# Altium PCB CET-124-120W.PcbDoc
Units mm, origin at the board's own origin, x right, y up, seen from the top; angles counter-clockwise.
Board outline 309.7 x 148.55 mm, 2 copper layers (Top Layer, Bottom Layer); 120 components, 59 nets, 857 pads, 0 vias.
Unrouted connection lines stored in the file: 4.
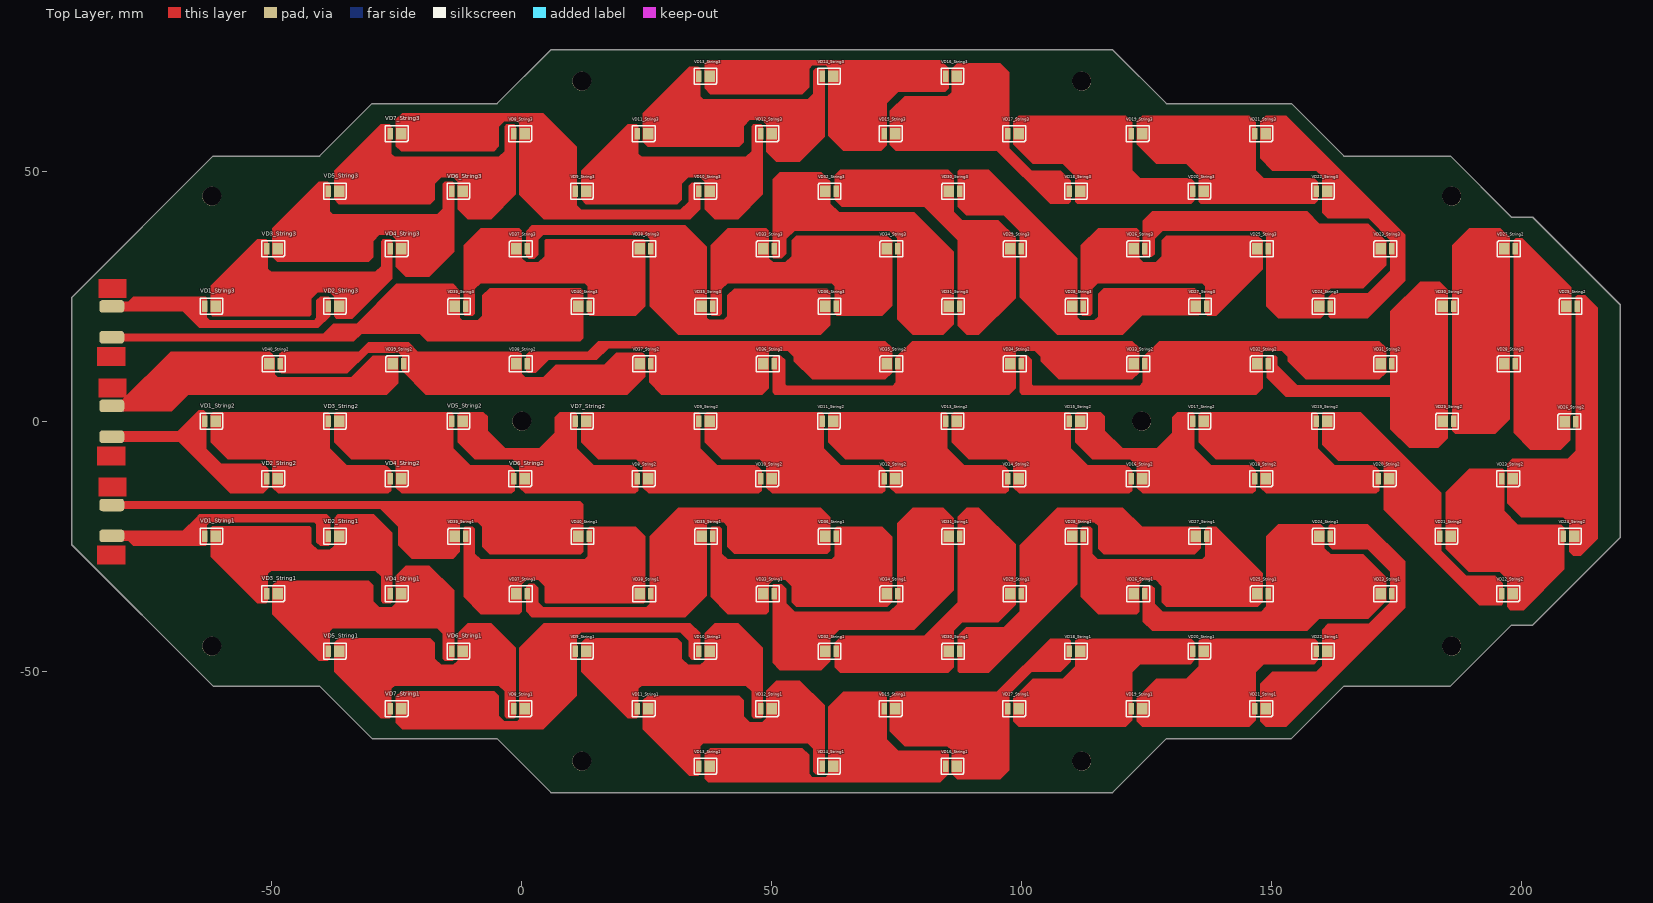
[diagram p0: Top Layer view]
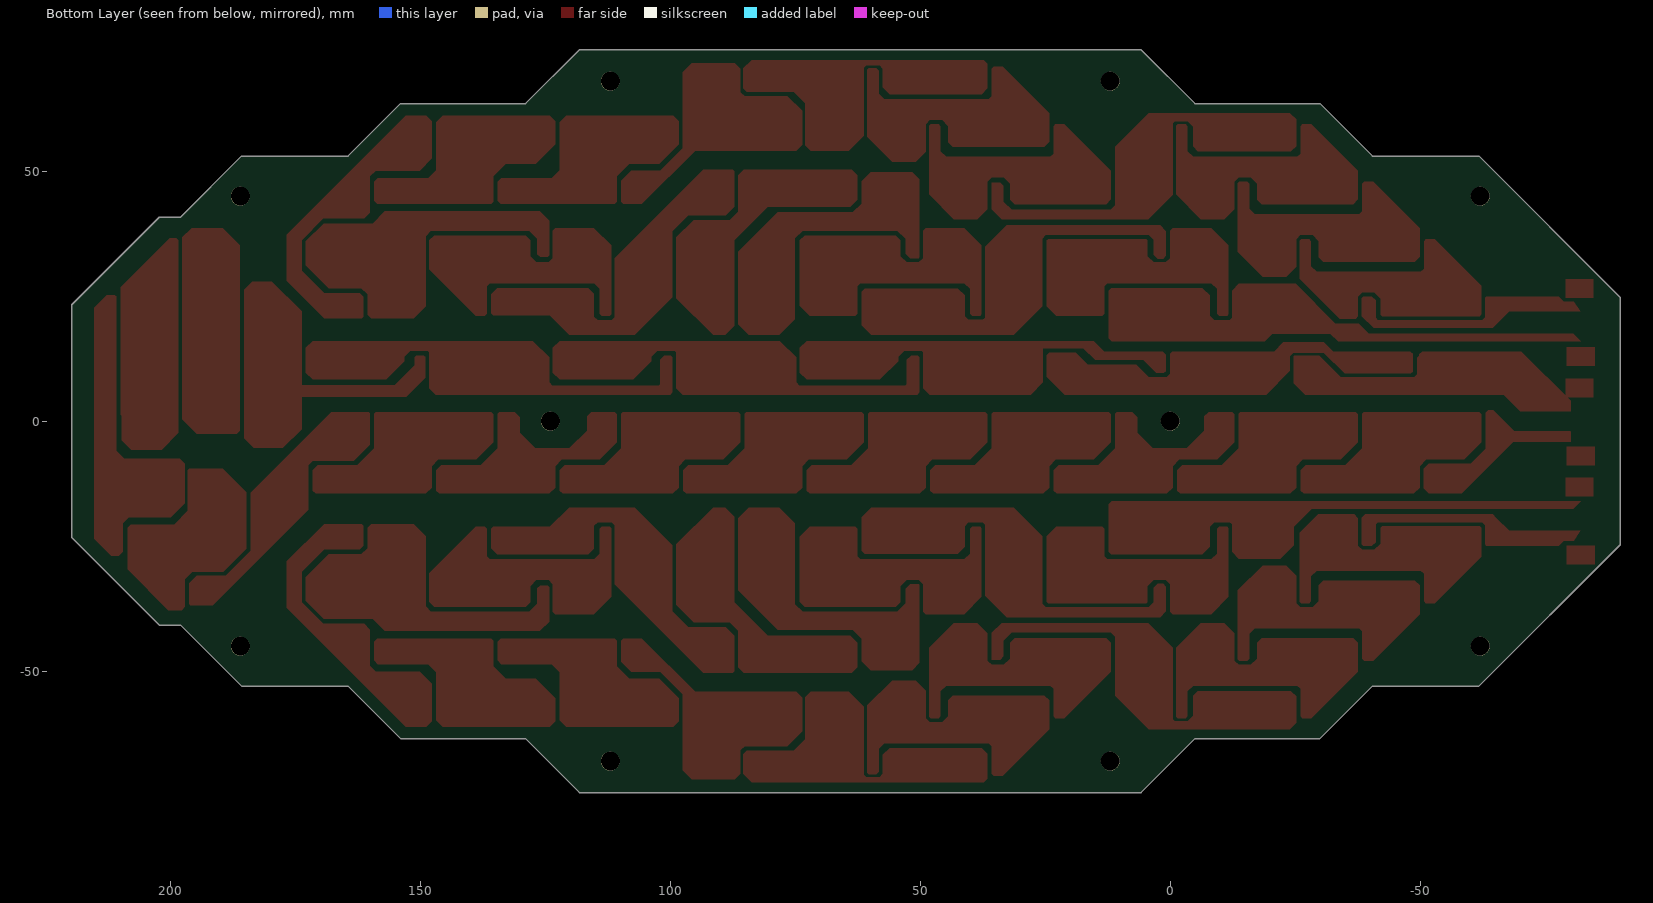
[diagram p1: Bottom Layer view, seen from below]

## Layer stack, top to bottom
Top Solder: solder mask 0.0102, Solder Resist, Dk 3.5
Top Layer: signal copper 0.0356
Dielectric 1: dielectric 0.32, FR-4, Dk 4.8
Bottom Layer: signal copper 0.0356
Bottom Solder: solder mask 0.0102, Solder Resist, Dk 3.5

## Board outline
-61.725,-53 -40.45,-53 -29.95,-63.5 -4.95,-63.5 5.825,-74.275 118.175,-74.275 128.95,-63.5 153.95,-63.5 164.45,-53 185.725,-53 197.95,-40.775 202.2,-40.775 219.7,-23.275 219.7,23.275 202.2,40.775 197.95,40.775 185.725,53 164.45,53 153.95,63.5 128.95,63.5 118.175,74.275 5.825,74.275 -4.95,63.5 -29.95,63.5 -40.45,53 -61.725,53 -90,24.725 -90,-24.725

## Design rules (kind name [scope] priority, off if disabled: settings)
Clearance [InNet('LED+') vs InNet('GND')] p1: gap=0.8
Clearance Clearance_1 [InNetClass('string')] p2: gap=0.55
Clearance Clearance_2 [All] p3: gap=0.254
ComponentClearance [All] p1: gap=0 collisioncheckmode=3 verticalgap=0 showdistances=FALSE
PolygonConnect [All] p1: connectstyle=Relief reliefconductorwidth=0.254 reliefentries=4 polygonreliefangle="90 Angle" airgapwidth=0.254
RoutingVias [All] p1: holewidth=0.711 width=1.27 viastyle="Through Hole" minholewidth=0.711 minwidth=1.27 maxholewidth=0.711 maxwidth=1.27
SolderMaskExpansion [All] p1: expansion=0.102
Width [All] p1: maxlimit=5 minlimit=0.1 preferedwidth=0.254
29 further rules are at their usual default settings.

## Classes and differential pairs
component class String1: VD1_String1 VD2_String1 VD3_String1 VD4_String1 VD5_String1 VD6_String1 VD7_String1 VD8_String1 VD9_String1 VD10_String1 VD11_String1 VD12_String1 VD13_String1 VD14_String1 VD15_String1 VD16_String1 VD17_String1 VD18_String1 VD19_String1 VD20_String1 VD21_String1 VD22_String1 VD23_String1 VD24_String1 VD25_String1 VD26_String1 VD27_String1 VD28_String1 VD29_String1 VD30_String1 VD31_String1 VD32_String1 VD33_String1 VD34_String1 VD35_String1 VD36_String1 VD37_String1 VD38_String1 VD39_String1 VD40_String1
component class String2: VD1_String2 VD2_String2 VD3_String2 VD4_String2 VD5_String2 VD6_String2 VD7_String2 VD8_String2 VD9_String2 VD10_String2 VD11_String2 VD12_String2 VD13_String2 VD14_String2 VD15_String2 VD16_String2 VD17_String2 VD18_String2 VD19_String2 VD20_String2 VD21_String2 VD22_String2 VD23_String2 VD24_String2 VD25_String2 VD26_String2 VD27_String2 VD28_String2 VD29_String2 VD30_String2 VD31_String2 VD32_String2 VD33_String2 VD34_String2 VD35_String2 VD36_String2 VD37_String2 VD38_String2 VD39_String2 VD40_String2
component class String3: VD1_String3 VD2_String3 VD3_String3 VD4_String3 VD5_String3 VD6_String3 VD7_String3 VD8_String3 VD9_String3 VD10_String3 VD11_String3 VD12_String3 VD13_String3 VD14_String3 VD15_String3 VD16_String3 VD17_String3 VD18_String3 VD19_String3 VD20_String3 VD21_String3 VD22_String3 VD23_String3 VD24_String3 VD25_String3 VD26_String3 VD27_String3 VD28_String3 VD29_String3 VD30_String3 VD31_String3 VD32_String3 VD33_String3 VD34_String3 VD35_String3 VD36_String3 VD37_String3 VD38_String3 VD39_String3 VD40_String3
channel class CET-124-120W: String1 String2 String3

## Components (designator, comment, footprint, x,y, rotation, side; value= is the part's Value field where it differs from the comment)
VD1_String1 "LED2835_6V_1W" 2835 -62,-23 r180 top (schematic designator VD1)
VD1_String2 "LED2835_6V_1W" 2835 -62,0 r180 top (schematic designator VD1)
VD1_String3 "LED2835_6V_1W" 2835 -62,23 r180 top (schematic designator VD1)
VD2_String1 "LED2835_6V_1W" 2835 -37.3,-23 r180 top (schematic designator VD2)
VD2_String2 "LED2835_6V_1W" 2835 -49.65,-11.5 r180 top (schematic designator VD2)
VD2_String3 "LED2835_6V_1W" 2835 -37.3,23 r180 top (schematic designator VD2)
VD3_String1 "LED2835_6V_1W" 2835 -49.65,-34.5 r180 top (schematic designator VD3)
VD3_String2 "LED2835_6V_1W" 2835 -37.3,0 r180 top (schematic designator VD3)
VD3_String3 "LED2835_6V_1W" 2835 -49.65,34.5 r180 top (schematic designator VD3)
VD4_String1 "LED2835_6V_1W" 2835 -24.95,-34.5 r180 top (schematic designator VD4)
VD4_String2 "LED2835_6V_1W" 2835 -24.95,-11.5 r180 top (schematic designator VD4)
VD4_String3 "LED2835_6V_1W" 2835 -24.95,34.5 r180 top (schematic designator VD4)
VD5_String1 "LED2835_6V_1W" 2835 -37.3,-46 r180 top (schematic designator VD5)
VD5_String2 "LED2835_6V_1W" 2835 -12.6,0 r180 top (schematic designator VD5)
VD5_String3 "LED2835_6V_1W" 2835 -37.3,46 r180 top (schematic designator VD5)
VD6_String1 "LED2835_6V_1W" 2835 -12.6,-46 r180 top (schematic designator VD6)
VD6_String2 "LED2835_6V_1W" 2835 -0.25,-11.5 r180 top (schematic designator VD6)
VD6_String3 "LED2835_6V_1W" 2835 -12.6,46 r180 top (schematic designator VD6)
VD7_String1 "LED2835_6V_1W" 2835 -24.95,-57.5 r180 top (schematic designator VD7)
VD7_String2 "LED2835_6V_1W" 2835 12.1,0 r180 top (schematic designator VD7)
VD7_String3 "LED2835_6V_1W" 2835 -24.95,57.5 r180 top (schematic designator VD7)
VD8_String1 "LED2835_6V_1W" 2835 -0.25,-57.5 r180 top (schematic designator VD8)
VD8_String2 "LED2835_6V_1W" 2835 24.45,-11.5 r180 top (schematic designator VD8)
VD8_String3 "LED2835_6V_1W" 2835 -0.25,57.5 r180 top (schematic designator VD8)
VD9_String1 "LED2835_6V_1W" 2835 12.1,-46 r180 top (schematic designator VD9)
VD9_String2 "LED2835_6V_1W" 2835 36.8,0 r180 top (schematic designator VD9)
VD9_String3 "LED2835_6V_1W" 2835 12.1,46 r180 top (schematic designator VD9)
VD10_String1 "LED2835_6V_1W" 2835 36.8,-46 r180 top (schematic designator VD10)
VD10_String2 "LED2835_6V_1W" 2835 49.15,-11.5 r180 top (schematic designator VD10)
VD10_String3 "LED2835_6V_1W" 2835 36.8,46 r180 top (schematic designator VD10)
VD11_String1 "LED2835_6V_1W" 2835 24.45,-57.5 r180 top (schematic designator VD11)
VD11_String2 "LED2835_6V_1W" 2835 61.5,0 r180 top (schematic designator VD11)
VD11_String3 "LED2835_6V_1W" 2835 24.45,57.5 r180 top (schematic designator VD11)
VD12_String1 "LED2835_6V_1W" 2835 49.15,-57.5 r180 top (schematic designator VD12)
VD12_String2 "LED2835_6V_1W" 2835 73.85,-11.5 r180 top (schematic designator VD12)
VD12_String3 "LED2835_6V_1W" 2835 49.15,57.5 r180 top (schematic designator VD12)
VD13_String1 "LED2835_6V_1W" 2835 36.8,-69 r180 top (schematic designator VD13)
VD13_String2 "LED2835_6V_1W" 2835 86.2,0 r180 top (schematic designator VD13)
VD13_String3 "LED2835_6V_1W" 2835 36.8,69 r180 top (schematic designator VD13)
VD14_String1 "LED2835_6V_1W" 2835 61.5,-69 r180 top (schematic designator VD14)
VD14_String2 "LED2835_6V_1W" 2835 98.55,-11.5 r180 top (schematic designator VD14)
VD14_String3 "LED2835_6V_1W" 2835 61.5,69 r180 top (schematic designator VD14)
VD15_String1 "LED2835_6V_1W" 2835 73.85,-57.5 r180 top (schematic designator VD15)
VD15_String2 "LED2835_6V_1W" 2835 110.9,0 r180 top (schematic designator VD15)
VD15_String3 "LED2835_6V_1W" 2835 73.85,57.5 r180 top (schematic designator VD15)
VD16_String1 "LED2835_6V_1W" 2835 86.2,-69 r180 top (schematic designator VD16)
VD16_String2 "LED2835_6V_1W" 2835 123.25,-11.5 r180 top (schematic designator VD16)
VD16_String3 "LED2835_6V_1W" 2835 86.2,69 r180 top (schematic designator VD16)
VD17_String1 "LED2835_6V_1W" 2835 98.55,-57.5 r180 top (schematic designator VD17)
VD17_String2 "LED2835_6V_1W" 2835 135.6,0 r180 top (schematic designator VD17)
VD17_String3 "LED2835_6V_1W" 2835 98.55,57.5 r180 top (schematic designator VD17)
VD18_String1 "LED2835_6V_1W" 2835 110.9,-46 r180 top (schematic designator VD18)
VD18_String2 "LED2835_6V_1W" 2835 147.95,-11.5 r180 top (schematic designator VD18)
VD18_String3 "LED2835_6V_1W" 2835 110.9,46 r180 top (schematic designator VD18)
VD19_String1 "LED2835_6V_1W" 2835 123.25,-57.5 r180 top (schematic designator VD19)
VD19_String2 "LED2835_6V_1W" 2835 160.3,0 r180 top (schematic designator VD19)
VD19_String3 "LED2835_6V_1W" 2835 123.25,57.5 r180 top (schematic designator VD19)
VD20_String1 "LED2835_6V_1W" 2835 135.6,-46 r180 top (schematic designator VD20)
VD20_String2 "LED2835_6V_1W" 2835 172.65,-11.5 r180 top (schematic designator VD20)
VD20_String3 "LED2835_6V_1W" 2835 135.6,46 r180 top (schematic designator VD20)
VD21_String1 "LED2835_6V_1W" 2835 147.95,-57.5 r180 top (schematic designator VD21)
VD21_String2 "LED2835_6V_1W" 2835 185,-23 r180 top (schematic designator VD21)
VD21_String3 "LED2835_6V_1W" 2835 147.95,57.5 r180 top (schematic designator VD21)
VD22_String1 "LED2835_6V_1W" 2835 160.3,-46 r180 top (schematic designator VD22)
VD22_String2 "LED2835_6V_1W" 2835 197.35,-34.5 r180 top (schematic designator VD22)
VD22_String3 "LED2835_6V_1W" 2835 160.3,46 r180 top (schematic designator VD22)
VD23_String1 "LED2835_6V_1W" 2835 172.65,-34.5 r0 top (schematic designator VD23)
VD23_String2 "LED2835_6V_1W" 2835 197.35,-11.5 r180 top (schematic designator VD23)
VD23_String3 "LED2835_6V_1W" 2835 172.65,34.5 r0 top (schematic designator VD23)
VD24_String1 "LED2835_6V_1W" 2835 160.3,-23 r0 top (schematic designator VD24)
VD24_String2 "LED2835_6V_1W" 2835 209.7,-23 r180 top (schematic designator VD24)
VD24_String3 "LED2835_6V_1W" 2835 160.3,23 r0 top (schematic designator VD24)
VD25_String1 "LED2835_6V_1W" 2835 147.95,-34.5 r0 top (schematic designator VD25)
VD25_String2 "LED2835_6V_1W" 2835 209.7,23 r0 top (schematic designator VD25)
VD25_String3 "LED2835_6V_1W" 2835 147.95,34.5 r0 top (schematic designator VD25)
VD26_String1 "LED2835_6V_1W" 2835 123.25,-34.5 r0 top (schematic designator VD26)
VD26_String2 "LED2835_6V_1W" 2835 209.45,-0.075 r0 top (schematic designator VD26)
VD26_String3 "LED2835_6V_1W" 2835 123.25,34.5 r0 top (schematic designator VD26)
VD27_String1 "LED2835_6V_1W" 2835 135.6,-23 r0 top (schematic designator VD27)
VD27_String2 "LED2835_6V_1W" 2835 197.35,34.5 r0 top (schematic designator VD27)
VD27_String3 "LED2835_6V_1W" 2835 135.6,23 r0 top (schematic designator VD27)
VD28_String1 "LED2835_6V_1W" 2835 110.9,-23 r0 top (schematic designator VD28)
VD28_String2 "LED2835_6V_1W" 2835 197.35,11.5 r0 top (schematic designator VD28)
VD28_String3 "LED2835_6V_1W" 2835 110.9,23 r0 top (schematic designator VD28)
VD29_String1 "LED2835_6V_1W" 2835 98.55,-34.5 r0 top (schematic designator VD29)
VD29_String2 "LED2835_6V_1W" 2835 185,0 r0 top (schematic designator VD29)
VD29_String3 "LED2835_6V_1W" 2835 98.55,34.5 r0 top (schematic designator VD29)
VD30_String1 "LED2835_6V_1W" 2835 86.2,-46 r0 top (schematic designator VD30)
VD30_String2 "LED2835_6V_1W" 2835 185,23 r0 top (schematic designator VD30)
VD30_String3 "LED2835_6V_1W" 2835 86.2,46 r0 top (schematic designator VD30)
VD31_String1 "LED2835_6V_1W" 2835 86.2,-23 r0 top (schematic designator VD31)
VD31_String2 "LED2835_6V_1W" 2835 172.65,11.5 r0 top (schematic designator VD31)
VD31_String3 "LED2835_6V_1W" 2835 86.2,23 r0 top (schematic designator VD31)
VD32_String1 "LED2835_6V_1W" 2835 61.5,-46 r0 top (schematic designator VD32)
VD32_String2 "LED2835_6V_1W" 2835 147.95,11.5 r0 top (schematic designator VD32)
VD32_String3 "LED2835_6V_1W" 2835 61.5,46 r0 top (schematic designator VD32)
VD33_String1 "LED2835_6V_1W" 2835 49.15,-34.5 r0 top (schematic designator VD33)
VD33_String2 "LED2835_6V_1W" 2835 123.25,11.5 r0 top (schematic designator VD33)
VD33_String3 "LED2835_6V_1W" 2835 49.15,34.5 r0 top (schematic designator VD33)
VD34_String1 "LED2835_6V_1W" 2835 73.85,-34.5 r0 top (schematic designator VD34)
VD34_String2 "LED2835_6V_1W" 2835 98.55,11.5 r0 top (schematic designator VD34)
VD34_String3 "LED2835_6V_1W" 2835 73.85,34.5 r0 top (schematic designator VD34)
VD35_String1 "LED2835_6V_1W" 2835 36.8,-23 r0 top (schematic designator VD35)
VD35_String2 "LED2835_6V_1W" 2835 73.85,11.5 r0 top (schematic designator VD35)
VD35_String3 "LED2835_6V_1W" 2835 36.8,23 r0 top (schematic designator VD35)
VD36_String1 "LED2835_6V_1W" 2835 61.5,-23 r0 top (schematic designator VD36)
VD36_String2 "LED2835_6V_1W" 2835 49.15,11.5 r0 top (schematic designator VD36)
VD36_String3 "LED2835_6V_1W" 2835 61.5,23 r0 top (schematic designator VD36)
VD37_String1 "LED2835_6V_1W" 2835 -0.25,-34.5 r0 top (schematic designator VD37)
VD37_String2 "LED2835_6V_1W" 2835 24.45,11.5 r0 top (schematic designator VD37)
VD37_String3 "LED2835_6V_1W" 2835 -0.25,34.5 r0 top (schematic designator VD37)
VD38_String1 "LED2835_6V_1W" 2835 24.45,-34.5 r0 top (schematic designator VD38)
VD38_String2 "LED2835_6V_1W" 2835 -0.25,11.5 r0 top (schematic designator VD38)
VD38_String3 "LED2835_6V_1W" 2835 24.45,34.5 r0 top (schematic designator VD38)
VD39_String1 "LED2835_6V_1W" 2835 -12.6,-23 r0 top (schematic designator VD39)
VD39_String2 "LED2835_6V_1W" 2835 -24.95,11.5 r0 top (schematic designator VD39)
VD39_String3 "LED2835_6V_1W" 2835 -12.6,23 r0 top (schematic designator VD39)
VD40_String1 "LED2835_6V_1W" 2835 12.1,-23 r0 top (schematic designator VD40)
VD40_String2 "LED2835_6V_1W" 2835 -49.65,11.5 r0 top (schematic designator VD40)
VD40_String3 "LED2835_6V_1W" 2835 12.1,23 r0 top (schematic designator VD40)

## Footprints (in the part's own frame and the unit in brackets; to place one, negate y for a bottom-side part, rotate by r counter-clockwise, add the part's x,y. Pads: shape width x height; smd on the part's side, far side on the other; paste and mask are expansions set on the pad)
2835 [mm] "1"
  round 0.1 on Mech15: 0(0.225,1.15) 0(0.225,-1.15) 0(0.825,1.15) 0(0.825,-1.15)
  rect 1.1x2.3 smd paste-0.5 mask+0.1: 1(1.375,0)
  rect 2.1x2.3 smd mask+0.1: 2(-0.825,0)
  silkscreen extent -2.24,-1.58 2.33,1.57, body extent -1.77,-1.4 1.74,1.4, height 0.82

## Part data
VD1_String1 VD1_String2 VD1_String3 VD2_String1 VD2_String2 VD2_String3 VD3_String1 VD3_String2 VD3_String3 VD4_String1 VD4_String2 VD4_String3 VD5_String1 VD5_String2 VD5_String3 VD6_String1 VD6_String2 VD6_String3 VD7_String1 VD7_String2 VD7_String3 VD8_String1 VD8_String2 VD8_String3 VD9_String1 VD9_String2 VD9_String3 VD10_String1 VD10_String2 VD10_String3 VD11_String1 VD11_String2 VD11_String3 VD12_String1 VD12_String2 VD12_String3 VD13_String1 VD13_String2 VD13_String3 VD14_String1 VD14_String2 VD14_String3 VD15_String1 VD15_String2 VD15_String3 VD16_String1 VD16_String2 VD16_String3 VD17_String1 VD17_String2 VD17_String3 VD18_String1 VD18_String2 VD18_String3 VD19_String1 VD19_String2 VD19_String3 VD20_String1 VD20_String2 VD20_String3 VD21_String1 VD21_String2 VD21_String3 VD22_String1 VD22_String2 VD22_String3 VD23_String1 VD23_String2 VD23_String3 VD24_String1 VD24_String2 VD24_String3 VD25_String1 VD25_String2 VD25_String3 VD26_String1 VD26_String2 VD26_String3 VD27_String1 VD27_String2 VD27_String3 VD28_String1 VD28_String2 VD28_String3 VD29_String1 VD29_String2 VD29_String3 VD30_String1 VD30_String2 VD30_String3 VD31_String1 VD31_String2 VD31_String3 VD32_String1 VD32_String2 VD32_String3 VD33_String1 VD33_String2 VD33_String3 VD34_String1 VD34_String2 VD34_String3 VD35_String1 VD35_String2 VD35_String3 VD36_String1 VD36_String2 VD36_String3 VD37_String1 VD37_String2 VD37_String3 VD38_String1 VD38_String2 VD38_String3 VD39_String1 VD39_String2 VD39_String3 VD40_String1 VD40_String2 VD40_String3: library part Светодиод

## Free pads (board coordinates)
  rrect50% 5x2.5 smd: 3(-82,-22.95) 3(-82,-16.775) 3(-82,-3.125) 3(-82,3.05) 3(-82,16.775) 3(-82,22.95)
  round 3.8 hole 3.8: 4(-62,-45) 4(-62,45) 4(0,0) 4(12,-68) 4(12,68) 4(112,-68) 4(112,68) 4(124,0) 4(186,-45) 4(186,45)
  round 1.524 on Mech1: 49(-62,-23) 49(-62,0) 49(-62,23) 50(-49.65,-34.5) 50(-49.65,-11.5) 50(-49.65,11.5) 50(-49.65,34.5) 50(-37.3,-23) 50(-37.3,0) 50(-37.3,23) 50(-37.3,-46) 50(-37.3,46) 51(-24.95,-34.5) 51(-24.95,-11.5) 51(-24.95,11.5) 51(-24.95,34.5) 51(-24.95,-57.5) 51(-24.95,57.5) 51(-12.6,-23) 51(-12.6,0) 51(-12.6,23) 51(-12.6,-46) 51(-12.6,46) 52(-0.25,-34.5) 52(-0.25,-11.5) 52(-0.25,11.5) 52(-0.25,34.5) 52(-0.25,-57.5) 52(-0.25,57.5) 52(12.1,-23) 52(12.1,0) 52(12.1,23) 52(12.1,-46) 52(12.1,46) 53(24.45,-34.5) 53(24.45,-11.5) 53(24.45,11.5) 53(24.45,34.5) 53(24.45,-57.5) 53(24.45,57.5) 53(36.8,-23) 53(36.8,0) 53(36.8,23) 53(36.8,-69) 53(36.8,-46) 53(36.8,46) 53(36.8,69) 54(49.15,-34.5) 54(49.15,-11.5) 54(49.15,11.5) 54(49.15,34.5) 54(49.15,-57.5) 54(49.15,57.5) 54(61.5,-23) 54(61.5,0) 54(61.5,23) 54(61.5,-86) 54(61.5,-69) 54(61.5,-46) 54(61.5,46) 54(61.5,69) 55(73.85,-34.5) 55(73.85,-11.5) 55(73.85,11.5) 55(73.85,34.5) 55(73.85,-57.5) 55(73.85,57.5) 55(86.2,-23) 55(86.2,0) 55(86.2,23) 55(86.2,-69) 55(86.2,-46) 55(86.2,46) 55(86.2,69) 56(98.55,-34.5) 56(98.55,-11.5) 56(98.55,11.5) 56(98.55,34.5) 56(98.55,-57.5) 56(98.55,57.5) 56(110.9,-23) 56(110.9,0) 56(110.9,23) 56(110.9,-46) 56(110.9,46) 57(123.25,-34.5) 57(123.25,-11.5) 57(123.25,11.5) 57(123.25,34.5) 57(123.25,-57.5) 57(123.25,57.5) 57(135.6,-23) 57(135.6,0) 57(135.6,23) 57(135.6,-46) 57(135.6,46) 58(147.95,-34.5) 58(147.95,-11.5) 58(147.95,11.5) 58(147.95,34.5) 58(147.95,-57.5) 58(147.95,57.5) 58(160.3,-23) 58(160.3,0) 58(160.3,23) 58(160.3,-46) 58(160.3,46) 59(172.65,-34.5) 59(172.65,-11.5) 59(172.65,11.5) 59(172.65,34.5) 59(185,-23) 59(185,0) 59(185,23) 59(197.35,-34.5) 59(197.35,-11.5) 59(197.35,11.5) 59(197.35,34.5) 60(209.7,-23) 60(209.7,0) 60(209.7,23)

## Nets (pads, with @x,y where several pads share a name; then routed paths per layer and width w, separated by ;. In a path a pad name is that pad's centre, name@x,y a point inside that pad or via, vN(x,y) a via of type N, cw(c..) or ccw(c..) an arc to the next point about the centre after c; other vN are vias at no path point)
GND: pad.3@-82,3.05 pad.3@-82,16.775 pad.3@-82,-16.775 VD39_String1.2 VD39_String2.2 VD39_String3.2 VD40_String1.2 VD40_String2.2 VD40_String3.2
LED+: pad.3@-82,22.95 pad.3@-82,-3.125 pad.3@-82,-22.95 VD1_String1.1 VD1_String2.1 VD1_String3.1 VD2_String1.1 VD2_String2.1 VD2_String3.1
NetVD1_String1_2: VD1_String1.2 VD2_String1.2 VD3_String1.1 VD4_String1.1
NetVD1_String2_2: VD1_String2.2 VD2_String2.2 VD3_String2.1 VD4_String2.1
NetVD1_String3_2: VD1_String3.2 VD2_String3.2 VD3_String3.1 VD4_String3.1
NetVD3_String1_2: VD3_String1.2 VD4_String1.2 VD5_String1.1 VD6_String1.1
NetVD3_String2_2: VD3_String2.2 VD4_String2.2 VD5_String2.1 VD6_String2.1
NetVD3_String3_2: VD3_String3.2 VD4_String3.2 VD5_String3.1 VD6_String3.1
NetVD5_String1_2: VD5_String1.2 VD6_String1.2 VD7_String1.1 VD8_String1.1
NetVD5_String2_2: VD5_String2.2 VD6_String2.2 VD7_String2.1 VD8_String2.1
NetVD5_String3_2: VD5_String3.2 VD6_String3.2 VD7_String3.1 VD8_String3.1
NetVD7_String1_2: VD7_String1.2 VD8_String1.2 VD9_String1.1 VD10_String1.1
NetVD7_String2_2: VD7_String2.2 VD8_String2.2 VD9_String2.1 VD10_String2.1
NetVD7_String3_2: VD7_String3.2 VD8_String3.2 VD9_String3.1 VD10_String3.1
NetVD9_String1_2: VD9_String1.2 VD10_String1.2 VD11_String1.1 VD12_String1.1
NetVD9_String2_2: VD9_String2.2 VD10_String2.2 VD11_String2.1 VD12_String2.1
NetVD9_String3_2: VD9_String3.2 VD10_String3.2 VD11_String3.1 VD12_String3.1
NetVD11_String1_2: VD11_String1.2 VD12_String1.2 VD13_String1.1 VD14_String1.1
NetVD11_String2_2: VD11_String2.2 VD12_String2.2 VD13_String2.1 VD14_String2.1
NetVD11_String3_2: VD11_String3.2 VD12_String3.2 VD13_String3.1 VD14_String3.1
NetVD13_String1_2: VD13_String1.2 VD14_String1.2 VD15_String1.1 VD16_String1.1
NetVD13_String2_2: VD13_String2.2 VD14_String2.2 VD15_String2.1 VD16_String2.1
NetVD13_String3_2: VD13_String3.2 VD14_String3.2 VD15_String3.1 VD16_String3.1
NetVD15_String1_2: VD15_String1.2 VD16_String1.2 VD17_String1.1 VD18_String1.1
NetVD15_String2_2: VD15_String2.2 VD16_String2.2 VD17_String2.1 VD18_String2.1
NetVD15_String3_2: VD15_String3.2 VD16_String3.2 VD17_String3.1 VD18_String3.1
NetVD17_String1_2: VD17_String1.2 VD18_String1.2 VD19_String1.1 VD20_String1.1
NetVD17_String2_2: VD17_String2.2 VD18_String2.2 VD19_String2.1 VD20_String2.1
NetVD17_String3_2: VD17_String3.2 VD18_String3.2 VD19_String3.1 VD20_String3.1
NetVD19_String1_2: VD19_String1.2 VD20_String1.2 VD21_String1.1 VD22_String1.1
NetVD19_String2_2: VD19_String2.2 VD20_String2.2 VD21_String2.1 VD22_String2.1
NetVD19_String3_2: VD19_String3.2 VD20_String3.2 VD21_String3.1 VD22_String3.1
NetVD21_String1_2: VD21_String1.2 VD22_String1.2 VD23_String1.1 VD24_String1.1
NetVD21_String2_2: VD21_String2.2 VD22_String2.2 VD23_String2.1 VD24_String2.1
NetVD21_String3_2: VD21_String3.2 VD22_String3.2 VD23_String3.1 VD24_String3.1
NetVD23_String1_2: VD23_String1.2 VD24_String1.2 VD25_String1.1 VD26_String1.1
NetVD23_String2_2: VD23_String2.2 VD24_String2.2 VD25_String2.1 VD26_String2.1
NetVD23_String3_2: VD23_String3.2 VD24_String3.2 VD25_String3.1 VD26_String3.1
NetVD25_String1_2: VD25_String1.2 VD26_String1.2 VD27_String1.1 VD28_String1.1
NetVD25_String2_2: VD25_String2.2 VD26_String2.2 VD27_String2.1 VD28_String2.1
NetVD25_String3_2: VD25_String3.2 VD26_String3.2 VD27_String3.1 VD28_String3.1
NetVD27_String1_2: VD27_String1.2 VD28_String1.2 VD29_String1.1 VD30_String1.1
NetVD27_String2_2: VD27_String2.2 VD28_String2.2 VD29_String2.1 VD30_String2.1
NetVD27_String3_2: VD27_String3.2 VD28_String3.2 VD29_String3.1 VD30_String3.1
NetVD29_String1_2: VD29_String1.2 VD30_String1.2 VD31_String1.1 VD32_String1.1
NetVD29_String2_2: VD29_String2.2 VD30_String2.2 VD31_String2.1 VD32_String2.1
NetVD29_String3_2: VD29_String3.2 VD30_String3.2 VD31_String3.1 VD32_String3.1
NetVD31_String1_2: VD31_String1.2 VD32_String1.2 VD33_String1.1 VD34_String1.1
NetVD31_String2_2: VD31_String2.2 VD32_String2.2 VD33_String2.1 VD34_String2.1
NetVD31_String3_2: VD31_String3.2 VD32_String3.2 VD33_String3.1 VD34_String3.1
NetVD33_String1_2: VD33_String1.2 VD34_String1.2 VD35_String1.1 VD36_String1.1
NetVD33_String2_2: VD33_String2.2 VD34_String2.2 VD35_String2.1 VD36_String2.1
NetVD33_String3_2: VD33_String3.2 VD34_String3.2 VD35_String3.1 VD36_String3.1
NetVD35_String1_2: VD35_String1.2 VD36_String1.2 VD37_String1.1 VD38_String1.1
NetVD35_String2_2: VD35_String2.2 VD36_String2.2 VD37_String2.1 VD38_String2.1
NetVD35_String3_2: VD35_String3.2 VD36_String3.2 VD37_String3.1 VD38_String3.1
NetVD37_String1_2: VD37_String1.2 VD38_String1.2 VD39_String1.1 VD40_String1.1
NetVD37_String2_2: VD37_String2.2 VD38_String2.2 VD39_String2.1 VD40_String2.1
NetVD37_String3_2: VD37_String3.2 VD38_String3.2 VD39_String3.1 VD40_String3.1
pads on no net: VD1_String1.0 VD1_String2.0 VD1_String3.0 VD2_String1.0 VD2_String2.0 VD2_String3.0 VD3_String1.0 VD3_String2.0 VD3_String3.0 VD4_String1.0 VD4_String2.0 VD4_String3.0 VD5_String1.0 VD5_String2.0 VD5_String3.0 VD6_String1.0 VD6_String2.0 VD6_String3.0 VD7_String1.0 VD7_String2.0 VD7_String3.0 VD8_String1.0 VD8_String2.0 VD8_String3.0 VD9_String1.0 VD9_String2.0 VD9_String3.0 VD10_String1.0 VD10_String2.0 VD10_String3.0 VD11_String1.0 VD11_String2.0 VD11_String3.0 VD12_String1.0 VD12_String2.0 VD12_String3.0 VD13_String1.0 VD13_String2.0 VD13_String3.0 VD14_String1.0 VD14_String2.0 VD14_String3.0 VD15_String1.0 VD15_String2.0 VD15_String3.0 VD16_String1.0 VD16_String2.0 VD16_String3.0 VD17_String1.0 VD17_String2.0 VD17_String3.0 VD18_String1.0 VD18_String2.0 VD18_String3.0 VD19_String1.0 VD19_String2.0 VD19_String3.0 VD20_String1.0 VD20_String2.0 VD20_String3.0 VD21_String1.0 VD21_String2.0 VD21_String3.0 VD22_String1.0 VD22_String2.0 VD22_String3.0 VD23_String1.0 VD23_String2.0 VD23_String3.0 VD24_String1.0 VD24_String2.0 VD24_String3.0 VD25_String1.0 VD25_String2.0 VD25_String3.0 VD26_String1.0 VD26_String2.0 VD26_String3.0 VD27_String1.0 VD27_String2.0 VD27_String3.0 VD28_String1.0 VD28_String2.0 VD28_String3.0 VD29_String1.0 VD29_String2.0 VD29_String3.0 VD30_String1.0 VD30_String2.0 VD30_String3.0 VD31_String1.0 VD31_String2.0 VD31_String3.0 VD32_String1.0 VD32_String2.0 VD32_String3.0 VD33_String1.0 VD33_String2.0 VD33_String3.0 VD34_String1.0 VD34_String2.0 VD34_String3.0 VD35_String1.0 VD35_String2.0 VD35_String3.0 VD36_String1.0 VD36_String2.0 VD36_String3.0 VD37_String1.0 VD37_String2.0 VD37_String3.0 VD38_String1.0 VD38_String2.0 VD38_String3.0 VD39_String1.0 VD39_String2.0 VD39_String3.0 VD40_String1.0 VD40_String2.0 VD40_String3.0

## Other copper
Top Layer:
  rectangle: -84.65,24.675 -79.025,28.45
  rectangle: -84.925,11.05 -79.3,14.825
  rectangle: -84.925,-8.85 -79.3,-5.075
  rectangle net GND: -84.65,4.775 -79.025,8.55
  rectangle: -84.925,-28.675 -79.3,-24.9
  rectangle: -84.65,-15.05 -79.025,-11.275
  region net LED+: -63,-20.775 -62.425,-20.2 -41.525,-20.2 -41.075,-20.65 -41.075,-24.175 -40.35,-24.9 -38.625,-24.9 -38.35,-24.625 -38.35,-19.35 -39.05,-18.65 -64.475,-18.65 -65.2,-19.375 -65.2,-24.3 -64.6,-24.9 -63.25,-24.9 -63,-24.65
  region net NetVD1_String1_2: -50.775,-36.025 -51.125,-36.375 -52.95,-36.375 -53.35,-35.975 -62.225,-27.1 -62.225,-21.35 -61.875,-21 -42.4,-21 -42.1,-21.3 -42.1,-24.475 -40.825,-25.75 -38.4,-25.75 -37.525,-24.875 -37.525,-19.375 -36.8,-18.65 -29.6,-18.65 -25.9,-22.35 -25.9,-36.1 -26.175,-36.375 -27.775,-36.375 -28.15,-36 -28.15,-31.025 -29.3,-29.875 -50.15,-29.875 -50.775,-30.5
  region net NetVD3_String1_2: -38.425,-47.525 -38.775,-47.875 -40.6,-47.875 -41,-47.475 -49.875,-38.6 -49.875,-32.85 -48.925,-31.9 -30.65,-31.9 -29.75,-32.8 -29.75,-35.975 -28.475,-37.25 -26.05,-37.25 -25.175,-36.375 -25.175,-30.875 -23.2,-28.9 -18.5,-28.9 -13.55,-33.85 -13.55,-47.6 -13.825,-47.875 -15.425,-47.875 -15.8,-47.5 -15.8,-42.525 -16.95,-41.375 -37.8,-41.375 -38.425,-42
  region net NetVD5_String1_2: -26.075,-59.025 -26.425,-59.375 -28.25,-59.375 -28.65,-58.975 -37.525,-50.1 -37.525,-44.35 -36.575,-43.4 -18.3,-43.4 -17.4,-44.3 -17.4,-47.475 -16.125,-48.75 -13.7,-48.75 -12.825,-47.875 -12.825,-42.375 -10.85,-40.4 -6.15,-40.4 -1.2,-45.35 -1.2,-59.1 -1.475,-59.375 -3.075,-59.375 -3.45,-59 -3.45,-54.025 -4.6,-52.875 -25.45,-52.875 -26.075,-53.5
  region net NetVD37_String1_2: 13.225,-21.475 13.575,-21.125 22.813,-21.125 24.675,-22.988 24.675,-36.15 24.425,-36.4 4.75,-36.4 4.55,-36.2 4.55,-33.025 3.275,-31.75 0.85,-31.75 -0.025,-32.625 -0.025,-38.125 -0.475,-38.575 -8.225,-38.575 -11.65,-35.15 -11.65,-21.4 -11.375,-21.125 -9.775,-21.125 -9.4,-21.5 -9.4,-26.475 -8.25,-27.625 12.6,-27.625 13.225,-27
  region net NetVD9_String1_2: 23.325,-59.025 22.975,-59.375 21.15,-59.375 20.75,-58.975 11.875,-50.1 11.875,-44.35 12.825,-43.4 31.1,-43.4 32,-44.3 32,-47.475 33.275,-48.75 35.7,-48.75 36.575,-47.875 36.575,-42.375 38.55,-40.4 43.25,-40.4 48.2,-45.35 48.2,-59.1 47.925,-59.375 46.325,-59.375 45.95,-59 45.95,-54.025 44.8,-52.875 23.95,-52.875 23.325,-53.5
  region net NetVD11_String1_2: 35.675,-70.525 35.325,-70.875 33.5,-70.875 33.1,-70.475 24.225,-61.6 24.225,-55.85 25.175,-54.9 43.45,-54.9 44.35,-55.8 44.35,-58.975 45.625,-60.25 48.05,-60.25 48.925,-59.375 48.925,-53.875 50.9,-51.9 55.6,-51.9 60.55,-56.85 60.55,-70.325 60.3,-70.575 58.775,-70.575 58.3,-70.1 58.3,-65.525 57.15,-64.375 36.3,-64.375 35.675,-65
  region net NetVD33_String1_2: 62.625,-21.475 62.975,-21.125 72.075,-21.125 74.075,-23.125 74.075,-36.15 73.125,-37.1 54.85,-37.1 53.95,-36.2 53.95,-33.025 52.675,-31.75 50.25,-31.75 49.375,-32.625 49.375,-38.125 48.925,-38.575 41.175,-38.575 37.75,-35.15 37.75,-21.4 38.025,-21.125 39.625,-21.125 40,-21.5 40,-26.475 41.15,-27.625 62,-27.625 62.625,-27
  region net NetVD25_String1_2: 136.725,-21.475 137.075,-21.125 138.9,-21.125 139.3,-21.525 148.175,-30.4 148.175,-36.15 147.225,-37.1 128.95,-37.1 128.05,-36.2 128.05,-33.025 126.775,-31.75 124.35,-31.75 123.475,-32.625 123.475,-38.125 123.025,-38.575 115.275,-38.575 111.85,-35.15 111.85,-21.4 112.125,-21.125 113.725,-21.125 114.1,-21.5 114.1,-26.475 115.25,-27.625 136.1,-27.625 136.725,-27
  region net NetVD7_String1_2: -25.175,-55.025 -24.125,-53.975 -5.55,-53.975 -4.575,-54.95 -4.575,-58.925 -3.475,-60.025 -0.925,-60.025 -0.475,-59.575 -0.475,-45.275 4.425,-40.375 33.725,-40.375 35.7,-42.35 35.7,-47.675 33.975,-47.675 33.35,-47.05 33.35,-43.875 31.725,-42.25 11.925,-42.25 11.025,-43.15 11.025,-54.875 4.325,-61.575 -23.95,-61.575 -25.175,-60.35
  region net NetVD13_String1_2: 36.575,-66.55 37.7,-65.425 56.125,-65.425 57.45,-66.75 57.45,-70.525 58.125,-71.2 60.75,-71.2 61.275,-70.675 61.275,-57.125 64.275,-54.125 71.925,-54.125 73.025,-55.225 73.025,-63.625 75.325,-65.925 84.7,-65.925 85.375,-66.6 85.375,-70.55 83.7,-72.225 37.275,-72.225 36.575,-71.525
  region net NetVD15_String1_2: 73.625,-55.3 74.8,-54.125 95.025,-54.125 105.675,-43.475 109.425,-43.475 109.825,-43.875 109.825,-48.075 107.775,-50.125 101.975,-50.125 97.475,-54.625 97.475,-69.825 95.675,-71.625 87.125,-71.625 85.975,-70.475 85.975,-65.825 85.15,-65 76.575,-65 73.625,-62.05
  region net NetVD17_String1_2: 98.325,-55.425 102.225,-51.525 108.175,-51.525 110.675,-49.025 110.675,-43.925 111.125,-43.475 133.9,-43.475 134.525,-44.1 134.525,-47.85 133.775,-48.6 123.75,-48.6 122.15,-50.2 122.15,-59.825 120.85,-61.125 99.45,-61.125 98.325,-60
  region net NetVD19_String1_2: 123.025,-55.425 126.925,-51.525 132.875,-51.525 135.375,-49.025 135.375,-43.925 135.825,-43.475 158.6,-43.475 159.225,-44.1 159.225,-47.85 158.475,-48.6 148.45,-48.6 146.85,-50.2 146.85,-59.825 145.55,-61.125 124.15,-61.125 123.025,-60
  region net NetVD21_String1_2: 147.725,-52.55 150.15,-50.125 158.9,-50.125 160.075,-48.95 160.075,-41.7 161.225,-40.55 169.4,-40.55 173.725,-36.225 173.725,-30.1 169.25,-25.625 162.15,-25.625 161.45,-24.925 161.45,-20.875 161.725,-20.6 169.25,-20.6 176.7,-28.05 176.7,-37.325 152.925,-61.1 148.85,-61.1 147.725,-59.975
  region net NetVD23_String1_2: 172.875,-35.95 169.3,-39.525 159.5,-39.525 157.075,-41.95 126.1,-41.95 124.25,-40.1 124.25,-33.175 124.55,-32.875 126.05,-32.875 126.6,-33.425 126.6,-36.525 128.175,-38.1 147.875,-38.1 148.95,-37.025 148.95,-22.975 151.325,-20.6 159.825,-20.6 160.525,-21.3 160.525,-25.375 161.775,-26.625 168.3,-26.625 172.875,-31.2
  region net NetVD27_String1_2: 135.825,-21.55 135.425,-21.15 124.075,-21.15 120.225,-17.3 107.125,-17.3 99.625,-24.8 99.625,-38 96.425,-41.2 88.95,-41.2 87.225,-42.925 87.225,-50.025 87.5,-50.3 93.45,-50.3 111.125,-32.625 111.125,-20.8 111.75,-20.175 114.525,-20.175 115.275,-20.925 115.275,-25.525 116.375,-26.625 134.625,-26.625 135.825,-25.425
  region net NetVD29_String1_2: 98.775,-24.625 91.45,-17.3 89.025,-17.3 87.225,-19.1 87.225,-36.175 80.5,-42.9 64.025,-42.9 62.6,-44.325 62.6,-49.225 63.675,-50.3 85.3,-50.3 86.425,-49.175 86.425,-41.875 88.125,-40.175 95.35,-40.175 98.775,-36.75
  region net NetVD31_String1_2: 86.425,-19.4 84.325,-17.3 78.175,-17.3 75.075,-20.4 75.075,-36.575 73.55,-38.1 54.575,-38.1 52.925,-36.45 52.925,-33.525 52,-32.6 50.3,-32.6 50.15,-32.75 50.15,-48.35 51.6,-49.8 59.925,-49.8 61.725,-48 61.725,-43.5 63.475,-41.75 78.525,-41.75 86.425,-33.85
  region net NetVD35_String1_2: 61.725,-25.9 61.1,-26.525 42.475,-26.525 41.1,-25.15 41.1,-20.975 40.375,-20.25 37.5,-20.25 37.025,-20.725 37.025,-24.15 37.025,-34.9 32.725,-39.2 2.025,-39.2 0.85,-38.025 0.85,-33.075 1.4,-32.525 2.475,-32.525 3.275,-33.325 3.275,-36.25 4.275,-37.25 24.875,-37.25 25.6,-36.525 25.6,-23 31.3,-17.3 59.825,-17.3 61.725,-19.2
  region net GND: 12.325,-26.1 11.8,-26.625 -6.45,-26.625 -7.925,-25.15 -7.925,-21.075 -8.825,-20.175 -11.9,-20.175 -12.375,-20.65 -12.375,-26.125 -13.75,-27.5 -22.025,-27.5 -24.725,-24.8 -24.725,-21.15 -28.35,-17.525 -80.65,-17.525 -82.15,-16.025 -82.1,-15.975 11.725,-15.975 12.325,-16.575
  region net LED+: -81.975,-21.95 -67.775,-21.95 -65.2,-19.375 -64.775,-19.8 -64.775,-24.725 -64.6,-24.9 -77.675,-24.9 -78.7,-23.875 -80.675,-23.875
  region net LED+: -81.975,21.95 -67.775,21.95 -65.2,19.375 -64.775,19.8 -64.775,24.725 -64.6,24.9 -77.675,24.9 -78.7,23.875 -80.675,23.875
  region net GND: 12.325,26.1 11.8,26.625 -6.45,26.625 -7.925,25.15 -7.925,21.075 -8.825,20.175 -11.9,20.175 -12.375,20.65 -12.375,26.125 -13.75,27.5 -25.075,27.5 -33.05,19.525 -37.75,19.525 -39.75,17.525 -80.65,17.525 -82.15,16.025 -82.057,15.932 -33.593,15.932 -32,17.525 -20.45,17.525 -18.9,15.975 11.725,15.975 12.325,16.575
  region net NetVD5_String3_2: -26.075,59.025 -26.425,59.375 -28.25,59.375 -28.65,58.975 -37.525,50.1 -37.525,44.35 -36.575,43.4 -18.3,43.4 -17.4,44.3 -17.4,47.475 -16.125,48.75 -13.7,48.75 -12.825,47.875 -12.825,42.375 -10.85,40.4 -6.15,40.4 -1.2,45.35 -1.2,59.1 -1.475,59.375 -3.075,59.375 -3.45,59 -3.45,54.025 -4.6,52.875 -25.45,52.875 -26.075,53.5
  region net NetVD3_String3_2: -38.425,47.525 -38.775,47.875 -40.6,47.875 -41,47.475 -49.875,38.6 -49.875,32.85 -48.925,31.9 -30.65,31.9 -29.75,32.8 -29.75,35.975 -28.475,37.25 -26.05,37.25 -25.175,36.375 -25.175,30.875 -23.2,28.9 -18.5,28.9 -13.55,33.85 -13.55,47.6 -13.825,47.875 -15.425,47.875 -15.8,47.5 -15.8,42.525 -16.95,41.375 -37.8,41.375 -38.425,42
  region net NetVD1_String3_2: -50.775,36.025 -51.125,36.375 -52.95,36.375 -53.35,35.975 -62.225,27.1 -62.225,21.35 -61.875,21 -42.4,21 -42.1,21.3 -42.1,24.475 -40.825,25.75 -38.4,25.75 -37.525,24.875 -37.525,20.95 -37.1,20.525 -33.9,20.525 -25.9,28.525 -25.9,36.1 -26.175,36.375 -27.775,36.375 -28.15,36 -28.15,31.025 -29.3,29.875 -50.15,29.875 -50.775,30.5
  region net LED+: -63,20.775 -62.425,20.2 -41.525,20.2 -41.075,20.65 -41.075,24.175 -40.35,24.9 -38.625,24.9 -38.35,24.625 -38.35,20.975 -40.675,18.65 -64.475,18.65 -65.2,19.375 -65.2,24.3 -64.6,24.9 -63.25,24.9 -63,24.65
  region net NetVD35_String3_2: 61.725,25.9 61.1,26.525 42.475,26.525 41.1,25.15 41.1,20.975 40.375,20.25 37.5,20.25 37.025,20.725 37.025,24.15 37.025,34.9 32.725,39.2 2.025,39.2 0.85,38.025 0.85,33.075 1.4,32.525 2.475,32.525 3.275,33.325 3.275,36.25 4.275,37.25 24.875,37.25 25.6,36.525 25.6,23 31.3,17.3 59.825,17.3 61.725,19.2
  region net NetVD31_String3_2: 86.425,19.4 84.325,17.3 78.175,17.3 75.075,20.4 75.075,36.575 73.55,38.1 54.575,38.1 52.925,36.45 52.925,33.525 52,32.6 50.3,32.6 50.15,32.75 50.15,48.35 51.6,49.8 59.925,49.8 61.725,48 61.725,43.5 63.475,41.75 78.525,41.75 86.425,33.85
  region net NetVD29_String3_2: 98.775,24.625 91.45,17.3 89.025,17.3 87.225,19.1 87.225,36.175 80.5,42.9 64.025,42.9 62.6,44.325 62.6,49.225 63.675,50.3 85.3,50.3 86.425,49.175 86.425,41.875 88.125,40.175 95.35,40.175 98.775,36.75
  region net NetVD27_String3_2: 135.825,21.55 135.425,21.15 124.075,21.15 120.225,17.3 107.125,17.3 99.625,24.8 99.625,38 96.425,41.2 88.95,41.2 87.225,42.925 87.225,50.025 87.5,50.3 93.45,50.3 111.125,32.625 111.125,20.8 111.75,20.175 114.525,20.175 115.275,20.925 115.275,25.525 116.375,26.625 134.625,26.625 135.825,25.425
  region net NetVD23_String3_2: 172.875,35.95 169.3,39.525 159.5,39.525 157.075,41.95 126.1,41.95 124.25,40.1 124.25,33.175 124.55,32.875 126.05,32.875 126.6,33.425 126.6,36.525 128.175,38.1 147.875,38.1 148.95,37.025 148.95,22.975 151.325,20.6 159.825,20.6 160.525,21.3 160.525,25.375 161.775,26.625 168.3,26.625 172.875,31.2
  region net NetVD21_String3_2: 147.725,52.55 150.15,50.125 158.9,50.125 160.075,48.95 160.075,41.7 161.225,40.55 169.4,40.55 173.725,36.225 173.725,30.1 169.25,25.625 162.15,25.625 161.45,24.925 161.45,20.875 161.725,20.6 169.25,20.6 176.7,28.05 176.7,37.325 152.925,61.1 148.85,61.1 147.725,59.975
  region net NetVD19_String3_2: 123.025,55.425 126.925,51.525 132.875,51.525 135.375,49.025 135.375,43.925 135.825,43.475 158.6,43.475 159.225,44.1 159.225,47.85 158.475,48.6 148.45,48.6 146.85,50.2 146.85,59.825 145.55,61.125 124.15,61.125 123.025,60
  region net NetVD17_String3_2: 98.325,55.425 102.225,51.525 108.175,51.525 110.675,49.025 110.675,43.925 111.125,43.475 133.9,43.475 134.525,44.1 134.525,47.85 133.775,48.6 123.75,48.6 122.15,50.2 122.15,59.825 120.85,61.125 99.45,61.125 98.325,60
  region net NetVD15_String3_2: 73.625,55.3 74.8,54.125 95.025,54.125 105.675,43.475 109.425,43.475 109.825,43.875 109.825,48.075 107.775,50.125 101.975,50.125 97.475,54.625 97.475,69.825 95.675,71.625 87.125,71.625 85.975,70.475 85.975,65.825 85.15,65 76.575,65 73.625,62.05
  region net NetVD13_String3_2: 36.575,66.55 37.7,65.425 56.125,65.425 57.45,66.75 57.45,70.525 58.125,71.2 60.75,71.2 61.275,70.675 61.275,57.125 64.275,54.125 71.925,54.125 73.025,55.225 73.025,63.625 75.325,65.925 84.7,65.925 85.375,66.6 85.375,70.55 83.7,72.225 37.275,72.225 36.575,71.525
  region net NetVD7_String3_2: -25.175,55.025 -24.125,53.975 -5.55,53.975 -4.575,54.95 -4.575,58.925 -3.475,60.025 -0.925,60.025 -0.475,59.575 -0.475,45.275 4.425,40.375 33.725,40.375 35.7,42.35 35.7,47.675 33.975,47.675 33.35,47.05 33.35,43.875 31.725,42.25 11.925,42.25 11.025,43.15 11.025,54.875 4.325,61.575 -23.95,61.575 -25.175,60.35
  region net NetVD25_String3_2: 136.725,21.475 137.075,21.125 138.9,21.125 139.3,21.525 148.175,30.4 148.175,36.15 147.225,37.1 128.95,37.1 128.05,36.2 128.05,33.025 126.775,31.75 124.35,31.75 123.475,32.625 123.475,38.125 123.025,38.575 115.275,38.575 111.85,35.15 111.85,21.4 112.125,21.125 113.725,21.125 114.1,21.5 114.1,26.475 115.25,27.625 136.1,27.625 136.725,27
  region net NetVD33_String3_2: 62.625,21.475 62.975,21.125 72.075,21.125 74.075,23.125 74.075,36.15 73.125,37.1 54.85,37.1 53.95,36.2 53.95,33.025 52.675,31.75 50.25,31.75 49.375,32.625 49.375,38.125 48.925,38.575 41.175,38.575 37.75,35.15 37.75,21.4 38.025,21.125 39.625,21.125 40,21.5 40,26.475 41.15,27.625 62,27.625 62.625,27
  region net NetVD11_String3_2: 35.675,70.525 35.325,70.875 33.5,70.875 33.1,70.475 24.225,61.6 24.225,55.85 25.175,54.9 43.45,54.9 44.35,55.8 44.35,58.975 45.625,60.25 48.05,60.25 48.925,59.375 48.925,53.875 50.9,51.9 55.6,51.9 60.55,56.85 60.55,70.325 60.3,70.575 58.775,70.575 58.3,70.1 58.3,65.525 57.15,64.375 36.3,64.375 35.675,65
  region net NetVD9_String3_2: 23.325,59.025 22.975,59.375 21.15,59.375 20.75,58.975 11.875,50.1 11.875,44.35 12.825,43.4 31.1,43.4 32,44.3 32,47.475 33.275,48.75 35.7,48.75 36.575,47.875 36.575,42.375 38.55,40.4 43.25,40.4 48.2,45.35 48.2,59.1 47.925,59.375 46.325,59.375 45.95,59 45.95,54.025 44.8,52.875 23.95,52.875 23.325,53.5
  region net NetVD37_String3_2: 13.225,21.475 13.575,21.125 22.813,21.125 24.675,22.988 24.675,36.15 24.425,36.4 4.75,36.4 4.55,36.2 4.55,33.025 3.275,31.75 0.85,31.75 -0.025,32.625 -0.025,38.125 -0.475,38.575 -8.225,38.575 -11.65,35.15 -11.65,21.4 -11.375,21.125 -9.775,21.125 -9.4,21.5 -9.4,26.475 -8.25,27.625 12.6,27.625 13.225,27
  region net NetVD1_String2_2: -62.225,1.397 -61.822,1.8 -38.725,1.8 -38.4,1.475 -38.4,-5.4 -34.975,-8.825 -27.075,-8.825 -26.1,-9.8 -26.1,-13.875 -26.675,-14.45 -48.725,-14.45 -49.875,-13.3 -49.875,-8.975 -51.225,-7.625 -58.775,-7.625 -62.225,-4.175
  region net NetVD3_String2_2: -37.525,1.397 -37.122,1.8 -14.025,1.8 -13.7,1.475 -13.7,-5.4 -10.275,-8.825 -2.375,-8.825 -1.4,-9.8 -1.4,-13.875 -1.975,-14.45 -24.025,-14.45 -25.175,-13.3 -25.175,-8.975 -26.525,-7.625 -34.075,-7.625 -37.525,-4.175
  region net NetVD5_String2_2: -12.825,1.397 -12.422,1.8 -7.7,1.8 -6.85,0.95 -6.85,-1.875 -3.325,-5.4 3.475,-5.4 6.6,-2.275 6.6,0.8 7.6,1.8 10.675,1.8 11,1.475 11,-5.4 14.425,-8.825 22.325,-8.825 23.3,-9.8 23.3,-13.875 22.725,-14.45 0.675,-14.45 -0.475,-13.3 -0.475,-8.975 -1.825,-7.625 -9.375,-7.625 -12.825,-4.175
  region net NetVD15_String2_2: 110.675,1.397 111.078,1.8 115.8,1.8 116.65,0.95 116.65,-1.875 120.175,-5.4 126.975,-5.4 130.1,-2.275 130.1,0.8 131.1,1.8 134.175,1.8 134.5,1.475 134.5,-5.4 137.925,-8.825 145.825,-8.825 146.8,-9.8 146.8,-13.875 146.225,-14.45 124.175,-14.45 123.025,-13.3 123.025,-8.975 121.675,-7.625 114.125,-7.625 110.675,-4.175
  region net NetVD7_String2_2: 11.875,1.397 12.278,1.8 35.375,1.8 35.7,1.475 35.7,-5.4 39.125,-8.825 47.025,-8.825 48,-9.8 48,-13.875 47.425,-14.45 25.375,-14.45 24.225,-13.3 24.225,-8.975 22.875,-7.625 15.325,-7.625 11.875,-4.175
  region net NetVD9_String2_2: 36.575,1.397 36.978,1.8 60.075,1.8 60.4,1.475 60.4,-5.4 63.825,-8.825 71.725,-8.825 72.7,-9.8 72.7,-13.875 72.125,-14.45 50.075,-14.45 48.925,-13.3 48.925,-8.975 47.575,-7.625 40.025,-7.625 36.575,-4.175
  region net NetVD11_String2_2: 61.275,1.397 61.678,1.8 84.775,1.8 85.1,1.475 85.1,-5.4 88.525,-8.825 96.425,-8.825 97.4,-9.8 97.4,-13.875 96.825,-14.45 74.775,-14.45 73.625,-13.3 73.625,-8.975 72.275,-7.625 64.725,-7.625 61.275,-4.175
  region net NetVD13_String2_2: 85.975,1.397 86.378,1.8 109.475,1.8 109.8,1.475 109.8,-5.4 113.225,-8.825 121.125,-8.825 122.1,-9.8 122.1,-13.875 121.525,-14.45 99.475,-14.45 98.325,-13.3 98.325,-8.975 96.975,-7.625 89.425,-7.625 85.975,-4.175
  region net NetVD17_String2_2: 135.375,1.397 135.778,1.8 158.875,1.8 159.2,1.475 159.2,-5.4 162.625,-8.825 170.525,-8.825 171.5,-9.8 171.5,-13.875 170.925,-14.45 148.875,-14.45 147.725,-13.3 147.725,-8.975 146.375,-7.625 138.825,-7.625 135.375,-4.175
  region net NetVD19_String2_2: 160.075,-4.675 163.275,-7.875 171.5,-7.875 172.425,-8.8 172.425,-17.725 191.5,-36.8 195.975,-36.8 196.25,-36.525 196.25,-32.425 194.75,-30.925 188.925,-30.925 183.875,-25.875 183.875,-14.275 167.8,1.8 160.275,1.8 160.075,1.6
  region net NetVD21_String2_2: 197.125,-31.625 195.625,-30.125 189.4,-30.125 184.775,-25.5 184.775,-14.2 189.475,-9.5 196.175,-9.5 196.525,-9.85 196.525,-17.95 199.25,-20.675 207.875,-20.675 208.55,-21.35 208.55,-29.625 200.4,-37.775 197.75,-37.775 197.125,-37.15
  region net NetVD23_String2_2: 209.475,-26.125 210.3,-26.95 211.825,-26.95 215.225,-23.55 215.225,22.65 212.675,25.2 211.075,25.2 210.825,24.95 210.825,-5.875 209.175,-7.525 198.15,-7.525 197.125,-8.55 197.125,-16.425 199.925,-19.225 208.275,-19.225 209.475,-20.425
  region net NetVD25_String2_2: 209.925,26.775 200.1,36.6 198.85,36.6 198.4,36.15 198.4,-2.35 201.75,-5.7 207.825,-5.7 209.675,-3.85 209.675,1.075 209.925,1.325
  region net NetVD27_String2_2: 197.575,36.75 195.75,38.575 189.55,38.575 186.15,35.175 186.15,-1.875 186.75,-2.475 194.675,-2.475 197.575,0.425
  region net NetVD29_String2_2: 185.225,-3.425 183.3,-5.35 177.525,-5.35 173.75,-1.575 173.75,21.95 179.7,27.9 183.625,27.9 185.225,26.3
  region net NetVD29_String2_2: 149.05,8.675 152.825,4.9 174.3,4.9 174.3,7.225 155.075,7.225 151.15,11.15 151.15,12.775 150.85,13.075 149.275,13.075 149.05,12.85
  region net NetVD31_String2_2: 172.875,9.725 171.5,8.35 156.85,8.35 153.225,11.975 153.225,12.875 152.039,14.061 148.486,14.061 148.175,13.75 148.175,6.575 146.925,5.325 100.025,5.325 99.575,5.775 99.575,12.775 99.875,13.075 101.225,13.075 102.05,12.25 102.05,7.425 102.35,7.125 123.586,7.125 124.25,7.789 124.25,12.8 127.475,16.025 142.975,16.025 171.55,16.025 172.875,14.7
  region net NetVD33_String2_2: 123.475,9.725 122.1,8.35 107.45,8.35 103.825,11.975 103.825,12.875 102.639,14.061 99.086,14.061 98.775,13.75 98.775,6.575 97.525,5.325 50.625,5.325 50.175,5.775 50.175,12.775 50.475,13.075 51.825,13.075 52.65,12.25 52.65,7.425 52.95,7.125 74.186,7.125 74.85,7.789 74.85,12.8 78.075,16.025 93.575,16.025 122.15,16.025 123.475,14.7
  region net NetVD35_String2_2: 74.075,9.725 72.7,8.35 58.05,8.35 54.425,11.975 54.425,12.875 53.239,14.061 49.686,14.061 49.375,13.75 49.375,6.575 48.125,5.325 27.914,5.325 25.45,7.789 25.45,16.025 44.175,16.025 72.75,16.025 74.075,14.7
  region net NetVD35_String2_2: 25.775,16.025 15.275,16.025 13.175,13.925 1.525,13.925 0.9,13.3 0.9,10.025 1.275,9.65 2.775,9.65 5.425,12.3 15.025,12.3 17.35,14.625 25.825,14.625
  region net NetVD37_String2_2: 24.675,13.225 24.2,13.7 18.85,13.7 16.45,11.3 6.75,11.3 4.25,8.8 0.7,8.8 -0.025,9.525 -0.025,13.5 -0.45,13.925 -20.775,13.925 -22.625,15.775 -30.725,15.775 -32.575,13.925 -48.025,13.925 -48.475,13.475 -48.475,9.925 -48.1,9.55 -34.875,9.55 -30.725,13.7 -24.625,13.7 -23.9,12.975 -23.9,10.05 -19.175,5.325 -5.425,5.325 21.075,5.325 24.675,8.925
  region net GND: -24.725,13.025 -24.775,13.075 -29.85,13.075 -34.125,8.8 -48.825,8.8 -49.425,9.4 -49.425,12.65 -49.825,13.05 -49.825,13.375 -50.375,13.925 -70.2,13.925 -80.075,4.05 -80.075,2.025 -69.975,2.025 -66.675,5.325 -61.8,5.325 -26.975,5.325 -24.725,7.575
  region net LED+: -50.725,-13.375 -51.75,-14.4 -58.325,-14.4 -68.575,-4.15 -80.1,-4.15 -80.1,-2.1 -80.025,-2.025 -68.85,-2.025 -64.65,2.175 -63.625,2.175 -63.125,1.675 -63.125,-5.5 -60.125,-8.5 -51.725,-8.5 -50.725,-9.5

## Silkscreen, mask and mechanical layers (free items; w line width, h text height)
Top Solder:
  text "1+" at -83.95,25.175 h2.8
  text "1-" at -84.2,11.575 h2.8
  text "CET-124-120W" at -70.075,6.275 h1.5
  text "2-" at -83.95,5.275 h2.8
  text "2+" at -84.2,-8.325 h2.8
  text "3-" at -83.95,-14.55 h2.8
  text "3+" at -84.2,-28.15 h2.8
Mechanical 1:
  circle w0.2: c0,0 r4
  circle w0.2: c124,0 r4
  circle w0.2: c112,68 r4
  circle w0.2: c112,-68 r4
  circle w0.2: c12,-68 r4
  circle w0.2: c12,68 r4
  circle w0.2: c186,45 r4
  circle w0.2: c186,-45 r4
  circle w0.2: c-62,45 r4
  circle w0.2: c-62,-45 r4
  circle w0.254: c-24.95,-57.5 r7
  circle w0.254: c209.715,-23 r9
  lines w0.2: -64.975,-58.5 -41.15,-58.5
  lines w0.254: 52.69,-79.413 cw(c61.5,-86) 70.122,-79.169
Mechanical 4:
  lines w0.2: -90,-24.725 -61.725,-53 -40.45,-53 -29.95,-63.5 -4.95,-63.5 5.825,-74.275 118.175,-74.275 128.95,-63.5 153.95,-63.5 164.45,-53 185.725,-53 197.95,-40.775 202.2,-40.775 219.7,-23.275 219.7,23.275 202.2,40.775 197.95,40.775 185.725,53 164.45,53 153.95,63.5 128.95,63.5 118.175,74.275 5.825,74.275 -4.95,63.5 -29.95,63.5 -40.45,53 -61.725,53 -90,24.725 -90,0 -90,-24.725
Mechanical 6:
  drawing of 480 lines, arcs and shapes, not listed